# Altium PCB WizBoard.PcbDoc
Units mm, origin at the board's own origin, x right, y up, seen from the top; angles counter-clockwise.
Board outline 23.62 x 43.18 mm, 4 copper layers (Top Layer, GND, 3V3, Bottom Layer), stack 0.603 mm thick; 31 components, 48 nets, 165 pads, 62 vias.
Unrouted connection lines stored in the file: 6.
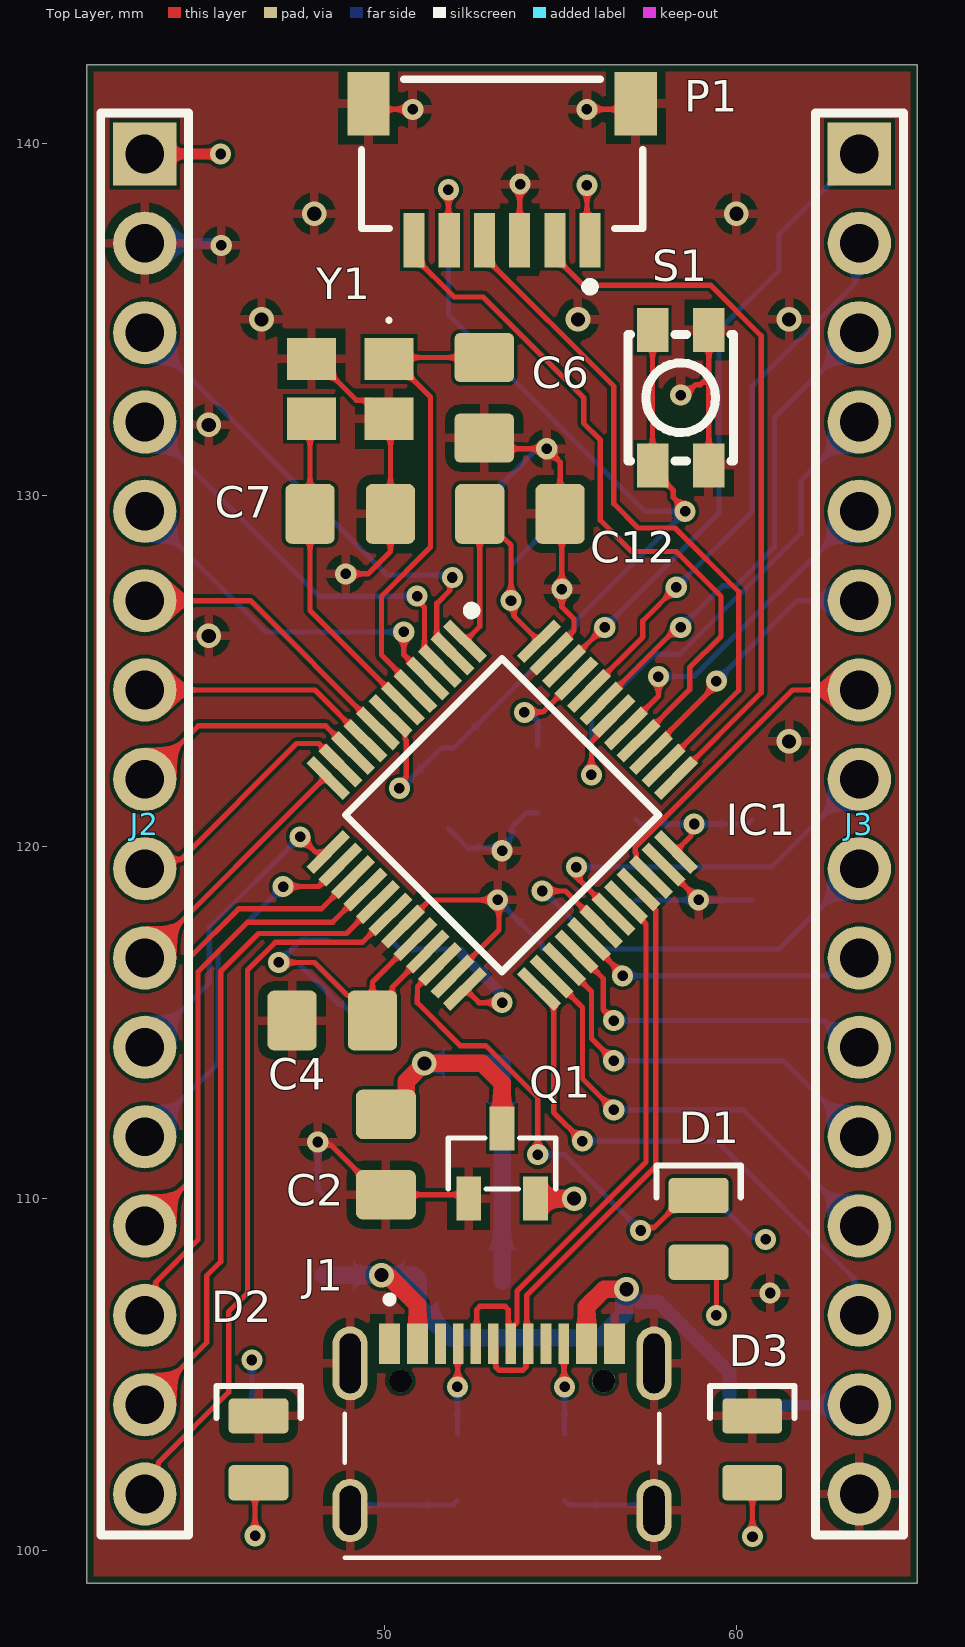
[diagram p0: Top Layer view]
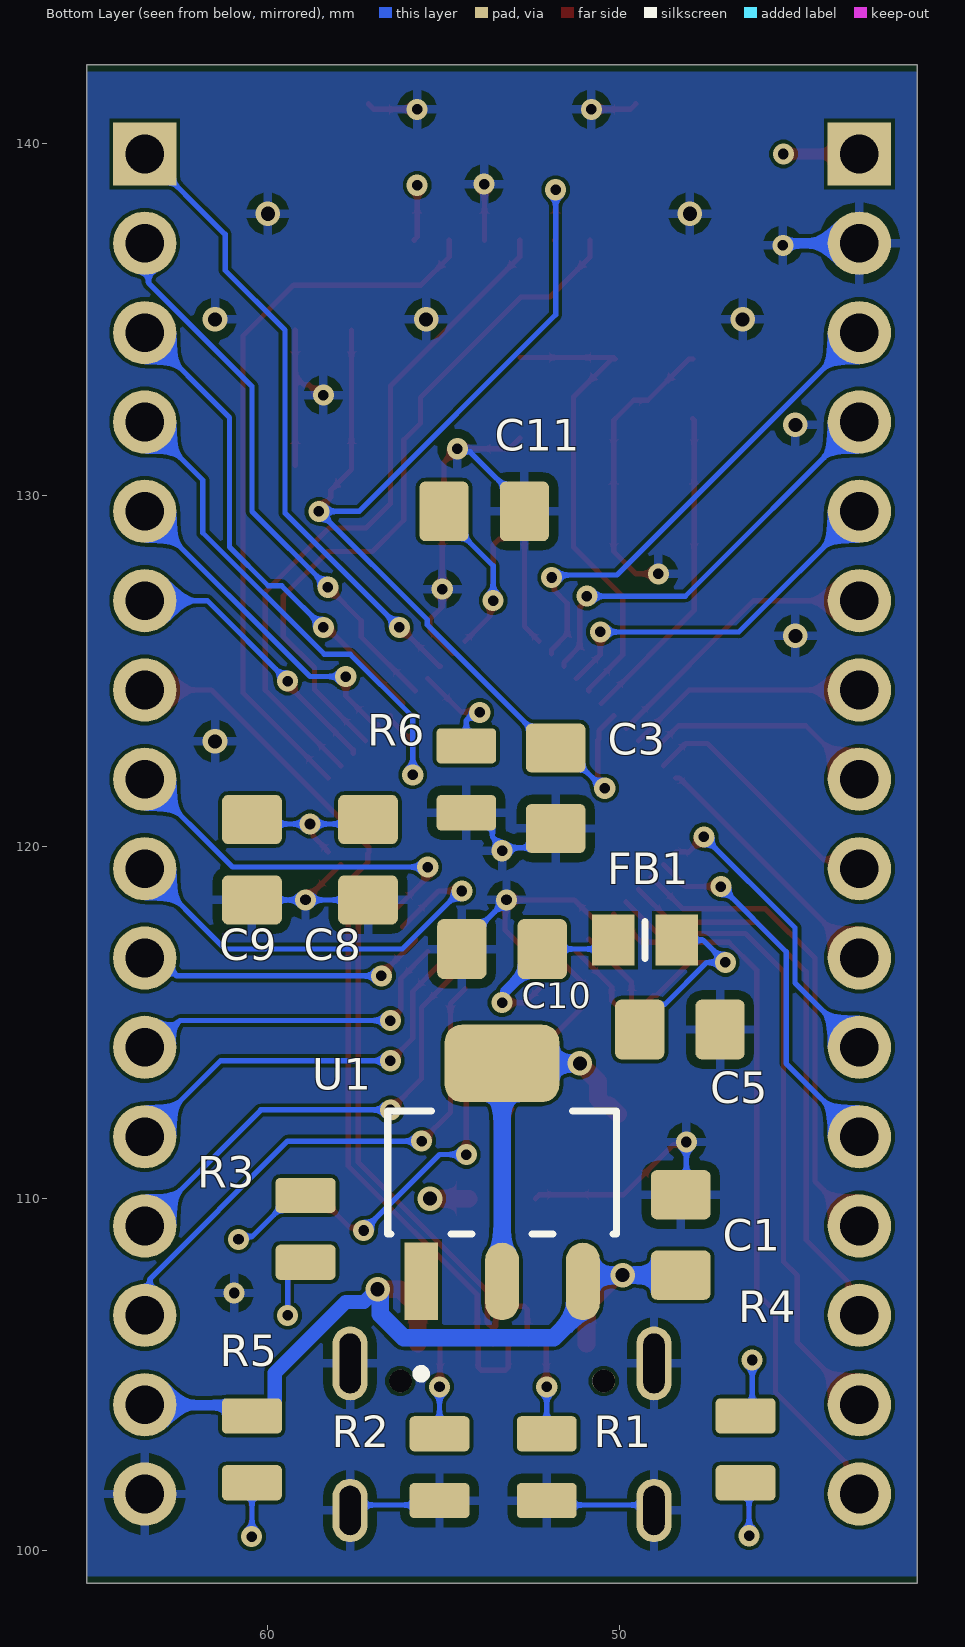
[diagram p1: Bottom Layer view, seen from below]
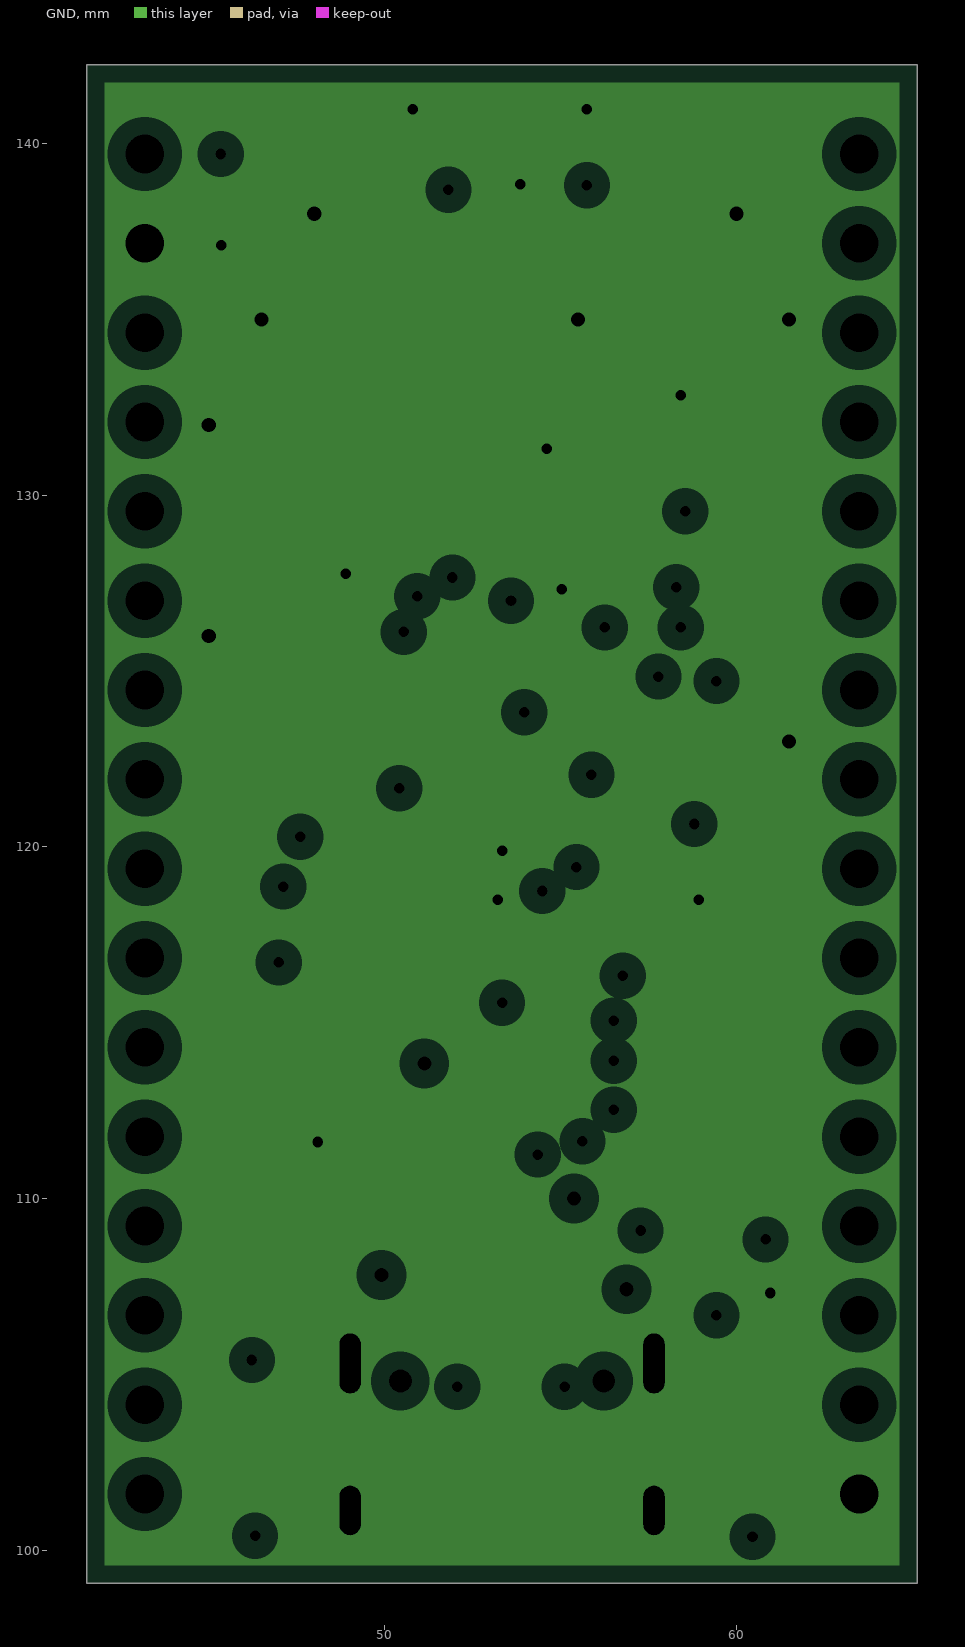
[diagram p2: GND, clearances drawn from the general rule]
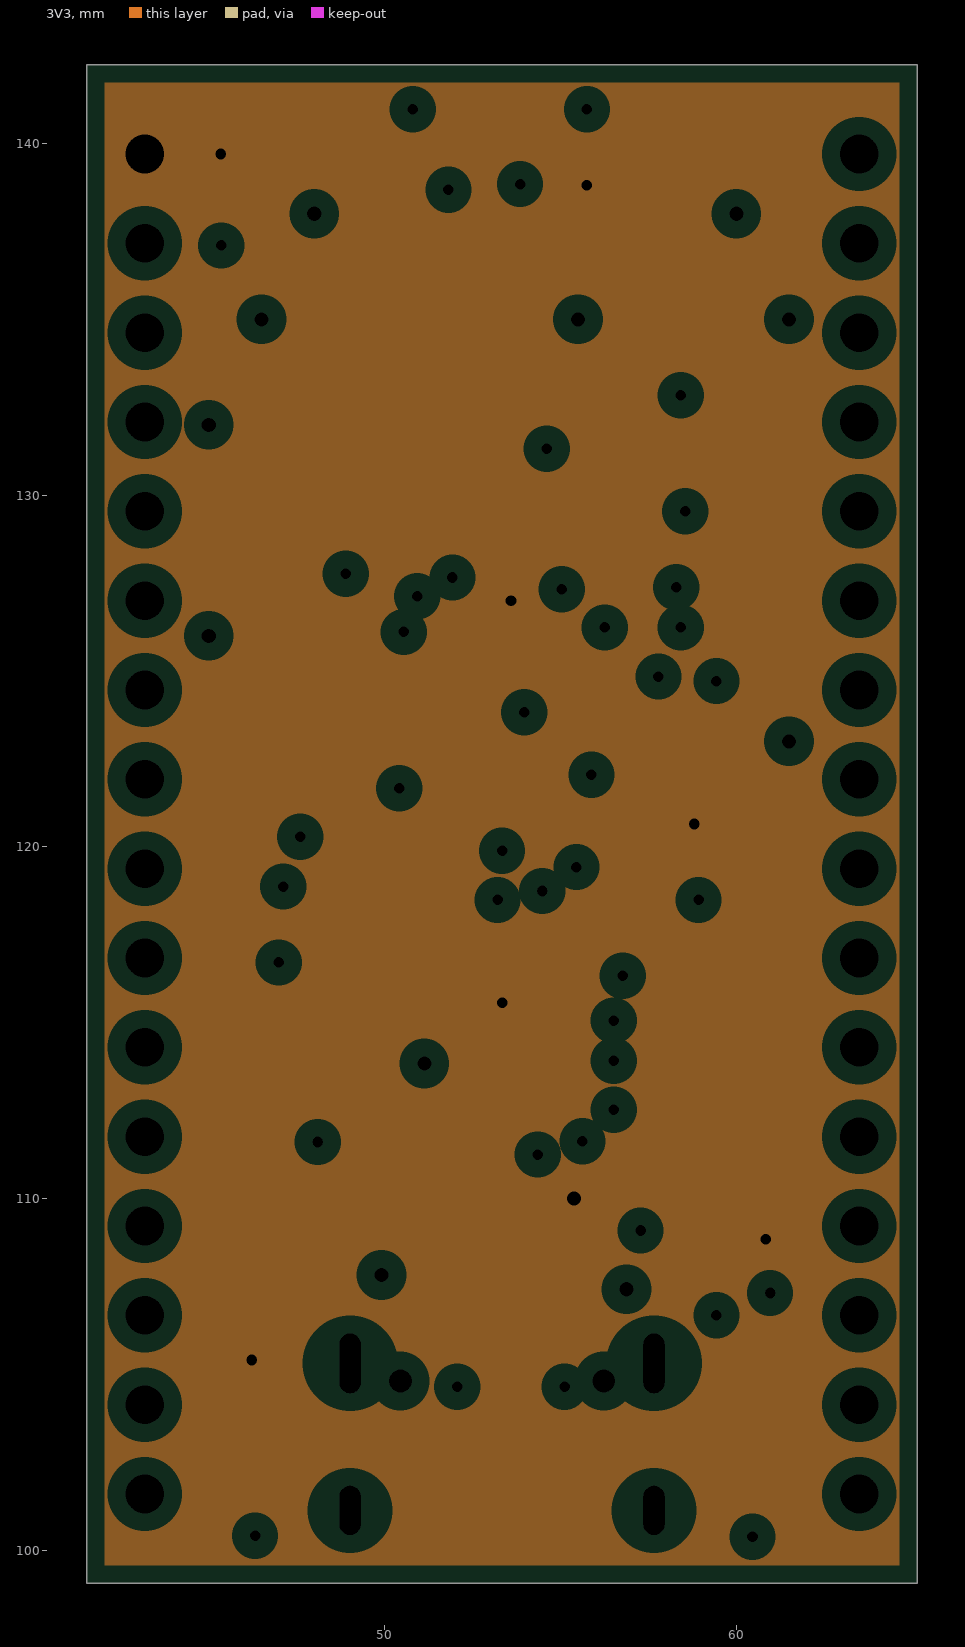
[diagram p3: 3V3, clearances drawn from the general rule]
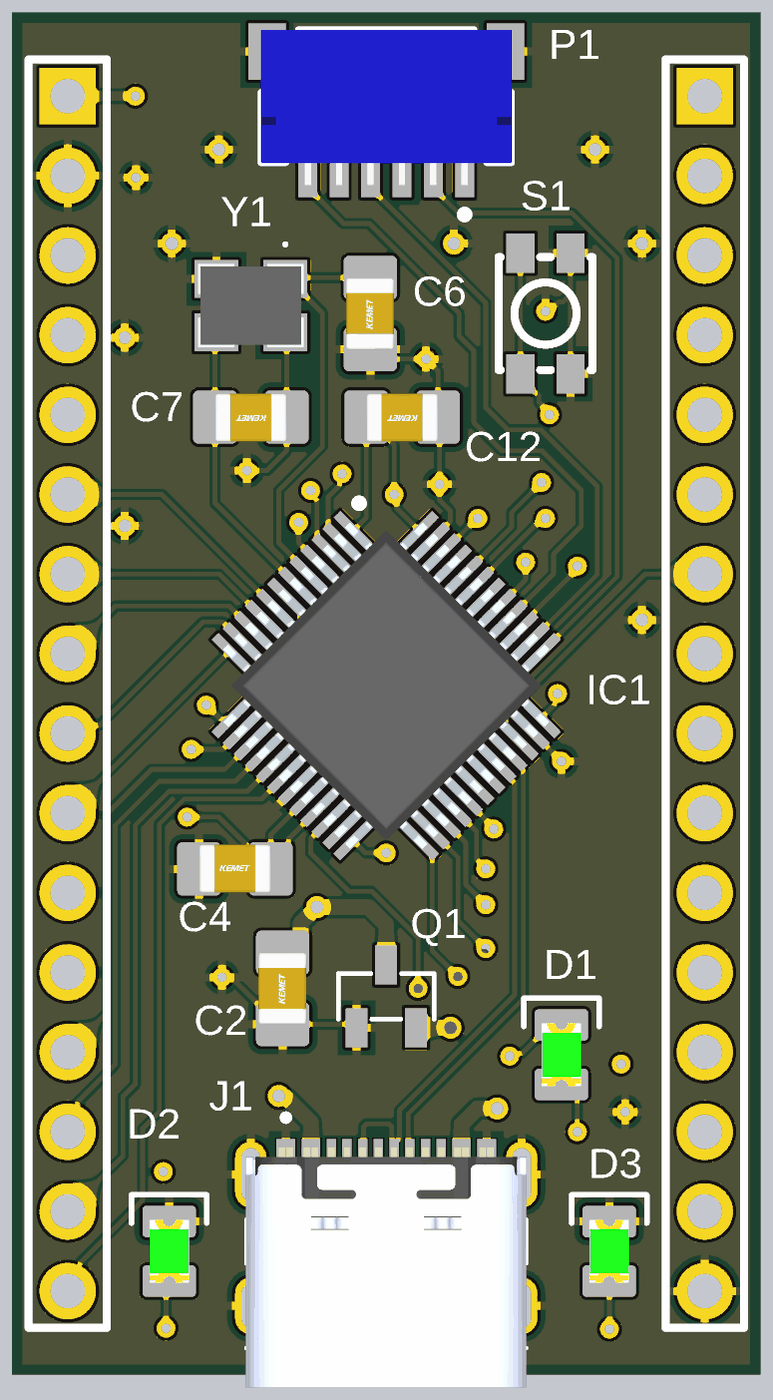
[diagram p4: 3D render of the assembled board from above, using the file's embedded part models]
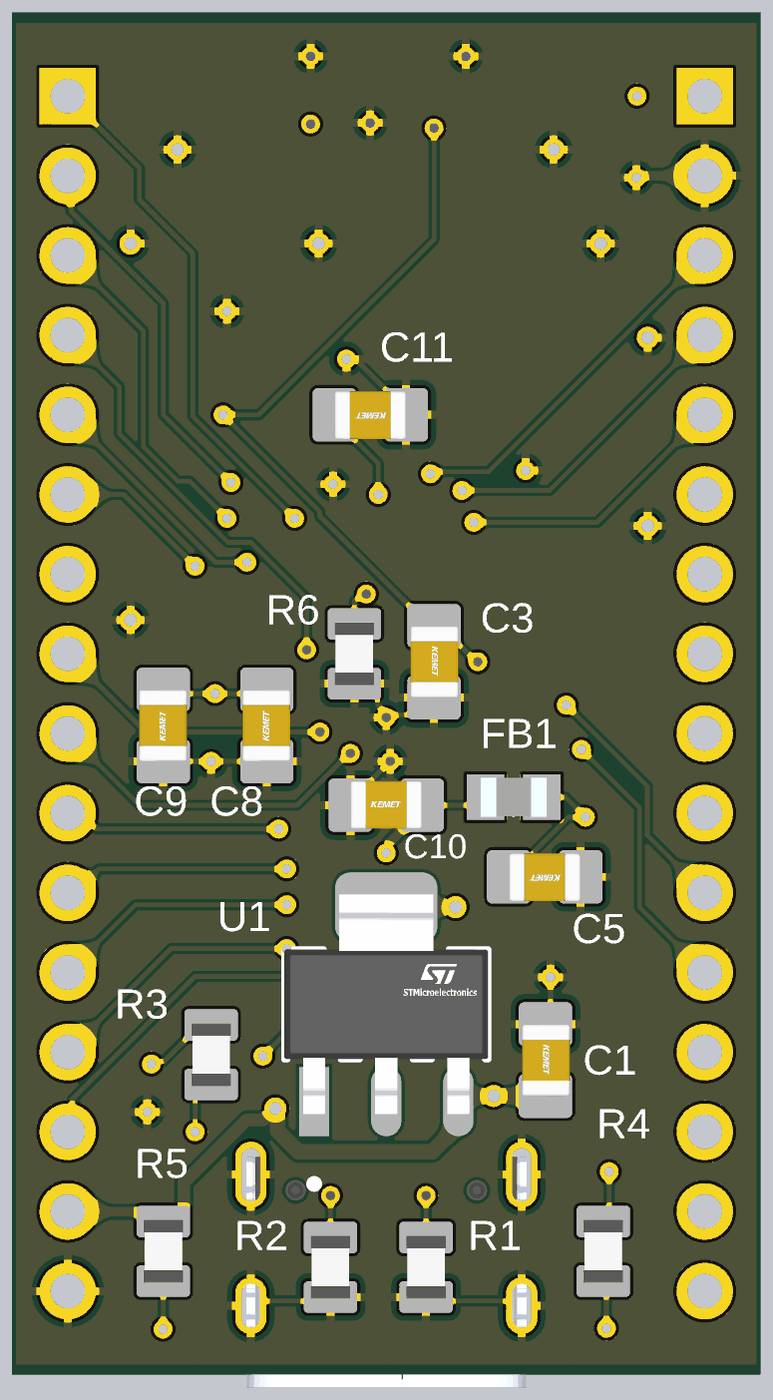
[diagram p5: 3D render of the assembled board from below, using the file's embedded part models]

## Layer stack, top to bottom
Top Solder: solder mask 0.0102, Solder Resist, Dk 3.5
Top Layer: signal copper 0.0356
Dielectric 2: prepreg 0.0711, PP-006, Dk 4.1
GND: plane copper 0.035, net GND
Dielectric 1: dielectric 0.32, FR-4, Dk 4.8
3V3: plane copper 0.035, net 3V3
Dielectric 3: prepreg 0.0711, PP-006, Dk 4.1
Bottom Layer: signal copper 0.0356
Bottom Solder: solder mask 0.0102, Solder Resist, Dk 3.5

## Board outline
41.529,99.06 41.529,142.24 65.151,142.24 65.151,99.06

## Design rules (kind name [scope] priority, off if disabled: settings)
BoardOutlineClearance [All] p1: gap=0.2 ignorepadtopadclearanceinfootprint=FALSE
Clearance [All] p1: gap=0.1 ignorepadtopadclearanceinfootprint=TRUE
Clearance Clearance_Layer [OnLayer('GND') Or OnLayer('5V')] p2: gap=0.2 ignorepadtopadclearanceinfootprint=TRUE
DiffPairsRouting [All] p1: maxlimit=0.152 minlimit=0.127 mostfreqgap=0.152 toplayer_minwidth=0.152 toplayer_maxwidth=0.178 toplayer_prefwidth=0.152 bottomlayer_minwidth=0.152 bottomlayer_maxwidth=0.178 bottomlayer_prefwidth=0.152 maxuncoupledlength=12.7
HoleSize [All] p1: absolutevalues=TRUE maxlimit=6.3 minlimit=0.15 maxpercent=80.000 minpercent=20.000
HoleToHoleClearance PAD-HoleToHoleClearance [IsPad] p1: gap=0.45 allowstackedmicrovias=FALSE
HoleToHoleClearance Via-HoleToHoleClearance [IsVia] p2: gap=0.2 allowstackedmicrovias=FALSE
MinimumAnnularRing [All] p1: minimumring=0.1
MinimumAnnularRing VIA-MinimumAnnularRing [IsVia] p2: minimumring=0.1
MinimumAnnularRing PAD-MinimumAnnularRing [IsPad] p3: minimumring=0.2
MinimumSolderMaskSliver [All] p1: minsoldermaskwidth=0.1
PlaneClearance [All] p1: clearance=0.508
PlaneConnect [All] p1: planeconnectstyle=Relief reliefexpansion=0.508 reliefentries=4 reliefconductorwidth=0.254 reliefairgap=0.254
PolygonConnect [All] p1: connectstyle=Relief reliefconductorwidth=0.254 reliefentries=4 polygonreliefangle="90 Angle" airgapwidth=0.254
RoutingVias [All] p1: holewidth=0.3 width=0.6 viastyle="Through Hole" minholewidth=0.2 minwidth=0.3 maxholewidth=6.3 maxwidth=6.5
SilkToSilkClearance [All] p1: silktosilkclearance=0.15
SolderMaskExpansion [All] p1: expansion=0.102 istentingtop=FALSE
SupplyNets "Schematic Supply Nets_4" [InNet('3V3')] p1: voltage=0.000
SupplyNets "Schematic Supply Nets_3" [InNet('3V3A')] p2: voltage=0.000
SupplyNets "Schematic Supply Nets_2" [InNet('LDO_OUT')] p3: voltage=0.000
SupplyNets "Schematic Supply Nets_1" [InNet('5V')] p4: voltage=0.000
SupplyNets "Schematic Supply Nets" [InNet('GND')] p5: voltage=0.000
Width [All] p1: maxlimit=10 minlimit=0.1 preferedwidth=0.15 toplayer_maxwidth=10 minimp=50.000000 maximp=50.000000 favimp=50.000000
23 further rules are at their usual default settings.

## Components (designator, comment, footprint, x,y, rotation, side; value= is the part's Value field where it differs from the comment)
C1 "1u" CAP_0805 48.26,108.966 r270 bottom locked
C2 "4.7u" CAP_0805 50.038,111.252 r90 top locked
C3 "100n" CAP_0805 51.816,121.666 r270 bottom locked
C4 "100n" CAP_0805 48.514,115.062 r0 top locked
C5 "1u" CAP_0805 48.284,114.808 r0 bottom locked
C6 "22p" CAP_0805 52.832,132.769 r90 top locked
C7 "22p" CAP_0805 49.022,129.467 r180 top locked
C8 "1u" CAP_0805 57.15,119.634 r90 bottom locked
C9 "100n" CAP_0805 60.452,119.634 r90 bottom locked
C10 "100n" CAP_0805 53.34,117.094 r180 bottom locked
C11 "100n" CAP_0805 53.848,129.54 r0 bottom locked
C12 "100n" CAP_0805 53.848,129.467 r180 top locked
D1 "GREEN" LED_0805_RED 58.928,109.138 r270 top locked
D2 "GREEN" LED_0805_RED 46.416,102.87 r270 top locked
D3 "GREEN" LED_0805_RED 60.452,102.87 r270 top locked
FB1 "GZ2012D601TF" BEADC2112X105N 49.276,117.348 r0 bottom locked
IC1 "STM32G474CBT6" QFP50P900X900X160-48N 53.34,120.904 r315 top locked
J1 "TYPE-C_16PIN_2MD_(073)" SHOUHAN_TYPE-C_16PIN_2MD_(073) 53.34,103.505 r0 top locked
J2 "ZX-PZ2.54-1-16PZZ" "16p Pin Header" 43.18,120.65 r270 top locked
J3 "ZX-PZ2.54-1-16PZZ" "16p Pin Header" 63.5,120.65 r270 top locked
P1 "6 Pin JST-SH" JST-SM06B-SRSS-TB_V 53.34,139.7 r180 top locked
Q1 "PJM10H01PSA" SOT-23 53.34,110.998 r270 top locked
R1 "5k1" RES_0805 52.07,102.362 r270 bottom locked
R2 "5k1" RES_0805 55.118,102.362 r270 bottom locked
R3 "470" RES_0805 58.928,109.138 r270 bottom locked
R4 "470" RES_0805 46.416,102.87 r270 bottom locked
R5 "470" RES_0805 60.452,102.87 r270 bottom locked
R6 "10k" RES_0805 54.356,121.92 r270 bottom locked
S1 "C4B1802110" SW-SMD_4P-L3.5-W3.0-P1.50-LS4.7 58.42,132.769 r90 top locked
U1 "LDL1117S33R" SOT-223 53.34,110.744 r90 bottom locked
Y1 "X32258MOB4SI" X32258MOB4SI 49.022,133.023 r180 top locked

## Footprints (in the part's own frame and the unit in brackets; to place one, negate y for a bottom-side part, rotate by r counter-clockwise, add the part's x,y. Pads: shape width x height; smd on the part's side, far side on the other; paste and mask are expansions set on the pad)
"16p Pin Header" [mm] "16p 2.54mm Pitch, 1 row, Mmale pin header"
  rect 1.8x1.8 hole 1.1: 1(-19.05,0)
  round 1.8 hole 1.1: 2(-16.51,0) 3(-13.97,0) 4(-11.43,0) 5(-8.89,0) 6(-6.35,0) 7(-3.81,0) 8(-1.27,0) 9(1.27,0) 10(3.81,0) 11(6.35,0) 12(8.89,0) 13(11.43,0) 14(13.97,0) 15(16.51,0) 16(19.05,0)
  silkscreen extent -20.22,-1.25 20.22,1.25
BEADC2112X105N [mm]
  rect 1.2x1.45 smd: 1(-0.9,0) 2(0.9,0)
  silkscreen extent 0,-0.53 0,0.53, body extent -1.05,-0.63 1.05,0.63, height 1.05
CAP_0805 [mm]
  rrect25% 1.4x1.7 smd: 1(-1.143,0) 2(1.143,0)
  body extent -1.15,-0.76 1.15,0.79, height 1.01
JST-SM06B-SRSS-TB_V [mm] "SMD, 6-Leads, Body 8x4.25mm, Pitch 1mm"
  rect 0.6x1.55 smd: 1(-2.5,2.45) 2(-1.5,2.45) 3(-0.5,2.45) 4(0.5,2.45) 5(1.5,2.45) 6(2.5,2.45)
  rect 1.2x1.8 smd: MP1(-3.8,-1.425) MP2(3.8,-1.425)
  silkscreen extent -4,-2.12 4,3.9, body extent -4,-2.12 4,2.83, height 2.96
LED_0805_RED [mm]
  rrect25% 1x1.7 smd: A(0.95,0) K(-0.95,0)
  silkscreen extent -1.8,-1.2 -0.9,1.2, body extent -1,-0.63 1,0.63, height 1.12
QFP50P900X900X160-48N [mm]
  rect 1.475x0.3 smd: 1(-4.238,2.75) 2(-4.238,2.25) 3(-4.238,1.75) 4(-4.238,1.25) 5(-4.238,0.75) 6(-4.238,0.25) 7(-4.238,-0.25) 8(-4.238,-0.75) 9(-4.238,-1.25) 10(-4.238,-1.75) 11(-4.238,-2.25) 12(-4.238,-2.75) 25(4.238,-2.75) 26(4.238,-2.25) 27(4.238,-1.75) 28(4.238,-1.25) 29(4.238,-0.75) 30(4.238,-0.25) 31(4.238,0.25) 32(4.238,0.75) 33(4.238,1.25) 34(4.238,1.75) 35(4.238,2.25) 36(4.238,2.75)
  rect 0.3x1.475 smd: 13(-2.75,-4.238) 14(-2.25,-4.238) 15(-1.75,-4.238) 16(-1.25,-4.238) 17(-0.75,-4.238) 18(-0.25,-4.238) 19(0.25,-4.238) 20(0.75,-4.238) 21(1.25,-4.238) 22(1.75,-4.238) 23(2.25,-4.238) 24(2.75,-4.238) 37(2.75,4.238) 38(2.25,4.238) 39(1.75,4.238) 40(1.25,4.238) 41(0.75,4.238) 42(0.25,4.238) 43(-0.25,4.238) 44(-0.75,4.238) 45(-1.25,4.238) 46(-1.75,4.238) 47(-2.25,4.238) 48(-2.75,4.238)
  silkscreen extent -4.85,-3.15 3.15,3.62, body extent -4.5,-4.5 4.5,4.5, height 1.6
RES_0805 [mm]
  rrect25% 1x1.7 smd: 1(-0.95,0) 2(0.95,0)
  body extent -1,-0.63 1,0.63, height 0.47
SHOUHAN_TYPE-C_16PIN_2MD_(073) [mm]
  rect 0.6x1.15 smd paste+0 mask+0: A1_B12(-3.2,2.372) A4_B9(-2.4,2.372) B1_A12(3.2,2.372) B4_A9(2.4,2.372)
  rect 0.3x1.15 smd paste+0 mask+0: A5(-1.25,2.372) A6(-0.25,2.372) A7(0.25,2.372) A8(1.25,2.372) B5(1.75,2.372) B6(0.75,2.372) B7(-0.75,2.372) B8(-1.75,2.372)
  oval 1x1.8 hole 0.6 slot 1.4 at 90 deg mask+0.102: SH1(-4.32,-2.372) SH2(4.32,-2.372)
  oval 1x2.1 hole 0.6 slot 1.7 at 90 deg mask+0.102: SH3(-4.32,1.807) SH4(4.32,1.807)
  round 0.65 hole 0.65 unplated mask+0: ""(-2.89,1.308) ""(2.89,1.308)
  silkscreen extent -4.47,-3.72 4.47,3.73, body extent -4.47,-4.97 4.47,2.68, height 3.26
SOT-23 [mm] "SOT-23-3_L2.9-W1.3-P0.95-LS2.4-BR"
  rect 1.25x0.7 smd: 1(1,-0.95) 2(1,0.95) 3(-1,0)
  silkscreen extent -0.73,-1.53 0.73,1.53
SOT-223 [mm]
  rect 2.204x0.96 smd paste+0 mask+0: 1(-3.1,2.3)
  rrect100% 2.204x0.96 smd paste+0 mask+0: 2(-3.1,0) 3(-3.1,-2.3)
  rrect44% 2.204x3.26 smd paste+0 mask+0: 4(3.1,0)
  silkscreen extent -5.85,-3.25 1.75,3.25, body extent -3.5,-3.25 3.5,3.25, height 1.9
SW-SMD_4P-L3.5-W3.0-P1.50-LS4.7 [mm]
  rect 1.25x0.9 smd: 1(-1.925,0.8) 2(1.925,0.8) 3(1.925,-0.8) 4(-1.925,-0.8)
  silkscreen extent -1.8,-1.5 1.8,1.5, body extent -2.22,-1.37 2.21,1.38, height 2.05
X32258MOB4SI [mm]
  rect 1.4x1.2 smd: 1(-1.1,-0.85) 2(1.1,-0.85) 3(1.1,0.85) 4(-1.1,0.85)
  silkscreen extent -1.15,-2 -1.05,-1.9, body extent -1.68,-1.33 1.68,1.33, height 0.9

## Part data
C1 C5 C8: library part CAP_0805, "Capacitor SMD 0805", LCSC=C116352, Manufacturer="Samsung Electro-Mechanics", Manufacturer Part Number=CL21B105KAFNNNE, Rating=25V, Distributor Link=https://www.lcsc.com/product-detail/C116352.html?spm=wm.fly.bg.0.xh___wm.fly.tp.4.ml&lcsc_vid=RgJaBFdeQAVXBFNWRFFdUVZXR1lbUVIAQgJYXwBWRlExVlNRQFhXX1FUQFNYUzsOAxUeFF5JWBYZEEoKFBINSQcJGk4eFQsCAgIaSgADAwAHC0slRVheUFZQTk8GEwkK
C2: library part CAP_0805, "Capacitor SMD 0805", LCSC=C98192, Manufacturer="Samsung Electro-Mechanics", Manufacturer Part Number=CL21A475KBQNNNE, Rating=50V, Distributor Link=https://www.lcsc.com/product-detail/C98192.html?spm=wm.fly.bg.0.xh___wm.fly.tp.4.ml&lcsc_vid=RgJaBFdeQAVXBFNWRFFdUVZXR1lbUVIAQgJYXwBWRlExVlNRQFhXX1FUQFNYUzsOAxUeFF5JWBYZEEoKFBINSQcJGk4eFQsCAgIaSgADAwAHC0slRVheUFZQTk8GEwkK
C3 C4 C9 C10 C11 C12: library part CAP_0805, "Capacitor SMD 0805", LCSC=C1711, Manufacturer="Samsung Electro-Mechanics", Manufacturer Part Number=CL21B104KBCNNNC, Rating=50V, Distributor Link=https://www.lcsc.com/product-detail/C1711.html?spm=wm.fly.bg.2.xh___wm.fly.tp.4.ml&lcsc_vid=RgJaBFdeQAVXBFNWRFFdUVZXR1lbUVIAQgJYXwBWRlExVlNRQFhXX1FUQFNYUzsOAxUeFF5JWBYZEEoKFBINSQcJGk4eFQsCAgIaSgADAwAHC0slRVheUFZQTk8GEwkK
C6 C7: library part CAP_0805, "Capacitor SMD 0805", LCSC=C1804, Manufacturer="Samsung Electro-Mechanics", Manufacturer Part Number=CL21C220JBANNNC, Rating=50V, Distributor Link=https://www.lcsc.com/product-detail/C1804.html?spm=wm.fly.bg.0.xh___wm.fly.tp.4.ml&lcsc_vid=RgJaBFdeQAVXBFNWRFFdUVZXR1lbUVIAQgJYXwBWRlExVlNRQFhXX1FUQFNYUzsOAxUeFF5JWBYZEEoKFBINSQcJGk4eFQsCAgIaSgADAwAHC0slRVheUFZQTk8GEwkK
D1 D2 D3: library part LED_0805_RED, "LED 0805 RED SMD"
FB1: "Ferrite Beads 600 @ 100MHz 500mA 0805 RoHS", Manufacturer_Name=SUNLORD, Datasheet Link=https://datasheet.lcsc.com/szlcsc/Sunlord-GZ2012D601TF_C1017.pdf, Height=1.05mm, Manufacturer_Part_Number=GZ2012D601TF
IC1: "Integrated Circuit", Arrow Part Number=STM32G474CBT6TR, LCSC=C730123, Manufacturer Name=STMicroelectronics, Mouser Part Number=511-STM32G474CBT6TR, Arrow Price/Stock=https://www.arrow.com/en/products/stm32g474cbt6tr/stmicroelectronics.html?utm_currency=USD&region=nac, Datasheet Link=https://www.st.com/resource/en/datasheet/stm32g474cb.pdf, Height=1.6mm, Manufacturer Part Number=STM32G474CBT6TR, Mouser Price/Stock=https://www.mouser.co.uk/ProductDetail/STMicroelectronics/STM32G474CBT6TR?qs=sPbYRqrBIVmx65Oml6enIQ%3D%3D
J1: "DC-5V 5A Type C USB"
J2 J3: "Pin Header 1 2.5mm 6mm -40℃~+105℃ 3mm 16P 2.54mm 3A 1x16P Through Hole,P=2.54mm Headers, Male Pins RoHS", Manufacturer=Megastar, Manufacturer Part Number=ZX-PZ2.54-1-16PZZ, Parameter 2=C7501270
P1: library part CMP-2000-07080-1, "Male Header, Pitch 1 mm, 1 x 6 Position, Height 2.95 mm, -25 to 85 degC, RoHS, Tape and Reel", Manufacturer=JST, Package Description="Male Header, Pitch 1 mm, 1 X 6 Position, Height 2.9 mm", Package Reference=SM06B-SRSS-TB, Datasheet URL=https://datasheet.ciiva.com/26894/getdatasheetpartid-708885-26894671.pdf, Datasheet Version=11/2010, Manufacturer URL=http://www.jst.com/home2.html, Mounting Technology=SurfaceMount, No of Positions=6, Pitch=1mm, Style/Orientation=RightAngleHeader/Plug, Termination=Solder, Type=ShroudedHeader
Q1: "P-Channel 100V 1A 0.5W Surface Mount SOT-23", LCSC=C2838029, Manufacturer=PJSEMI, Manufacturer Part Number=PJM10H01PSA
R1 R2: library part RES_0805, "Resistor SMD 0805", LCSC=C2907269, Manufacturer=FOJAN, Manufacturer Part Number=FRC0805F5101TS, Distributor Link=https://www.lcsc.com/product-detail/C2907269.html?spm=wm.fly.bg.2.xh___wm.mly.mlk.28-0-0.ml&lcsc_vid=RgJaBFdeQAVXBFNWRFFdUVZXR1lbUVIAQgJYXwBWRlExVlNRQFhXX1ZXT1RaUzsOAxUeFF5JWBYZEEoKFBINSQcJGk4dAgUUFAk%3D
R3 R4 R5: library part RES_0805, "Resistor SMD 0805", LCSC=C2907267, Manufacturer=FOJAN, Manufacturer Part Number=FRC0805F4700TS, Distributor Link=https://www.lcsc.com/product-detail/C2907267.html?spm=wm.fly.bg.1.stp___wm.mly.mlk.28-0-0.ml&lcsc_vid=RgJaBFdeQAVXBFNWRFFdUVZXR1lbUVIAQgJYXwBWRlExVlNRQFhXX1ZXT1RaUzsOAxUeFF5JWBYZEEoKFBINSQcJGk4dAgUUFAk%3D
R6: library part RES_0805, "Resistor SMD 0805", LCSC=C2907219, Manufacturer=FOJAN, Manufacturer Part Number=FRC0805F1002TS, Distributor Link=https://www.lcsc.com/product-detail/C2907219.html?spm=wm.fly.bg.1.xh___wm.mly.mlk.28-0-0.ml&lcsc_vid=RgJaBFdeQAVXBFNWRFFdUVZXR1lbUVIAQgJYXwBWRlExVlNRQFhXX1ZXT1RaUzsOAxUeFF5JWBYZEEoKFBINSQcJGk4dAgUUFAk%3D
S1: "SMD NO Push Button Switch"
U1: "IC REG LINEAR 3.3V 1.2A SOT223"
Y1: "Crystal or Oscillator", Manufacturer_Name=YXC, Datasheet Link=https://item.szlcsc.com/datasheet/X32258MOB4SI/2777872.html, Height=0.8mm, Manufacturer_Part_Number=X32258MOB4SI

## Via types
v1: diameter 0.6, hole 0.3, Top Layer to Bottom Layer, 50 vias
v2: diameter 0.7, hole 0.4, Top Layer to Bottom Layer, 12 vias

## Nets (pads, with @x,y where several pads share a name; then routed paths per layer and width w, separated by ;. In a path a pad name is that pad's centre, name@x,y a point inside that pad or via, vN(x,y) a via of type N, cw(c..) or ccw(c..) an arc to the next point about the centre after c; other vN are vias at no path point)
3V3: C8.2 C9.2 C10.2 C11.2 C12.2 FB1.2 IC1.1 IC1.24 IC1.36 IC1.48 J2.1 P1.1 Q1.2 R3.1 R4.1 | length 30
  Top Layer w0.15: IC1.24 52.681,115.57 v1(53.34,115.57) ; IC1.1 52.705,126.262 C12.2 52.705,129.371 53.322,128.754 53.418,128.754 53.594,128.578 v1(53.594,127) 53.68,126.914 53.68,126.557 IC1.48 ; v1(55.753,138.811) 55.753,137.337 P1.1 ; IC1.36 58.322,119.893 58.322,119.917 58.715,120.31 58.715,120.564 v1(58.801,120.65)
  Top Layer w0.3: J2.1 v1(45.339,139.7)
  Top Layer w0.5: Q1.2 v2(55.388,109.998)
  Bottom Layer w0.15: v1(46.228,105.41) 46.228,104.008 R4.1 ; FB1.2 50.43,117.094 C10.2 C10.2@52.197,116.944 ; 53.254,115.887 53.254,115.656 v1(53.34,115.57) ; v1(53.594,127) 53.594,127.993 54.991,129.39 C11.2 ; C8.2 57.277,120.65 60.325,120.65 C9.2 ; R3.1 59.278,110.088 60.441,108.925 60.747,108.925 v1(60.833,108.839)
  Bottom Layer w0.3: C10.2@52.197,116.944 53.254,115.887
3V3A: C4.2 C5.2 FB1.1 IC1.20 IC1.21 | length 13.7
  Top Layer w0.15: v1(46.99,116.713) 48.006,116.713 48.944,115.775 49.04,115.775 C4.2@49.657,115.158 ; IC1.20 49.657,116.16 C4.2@49.657,115.158 ; IC1.21 50.22,116.017 50.22,115.625 C4.2 C4.2@49.657,115.158
  Bottom Layer w0.15: FB1.1 47.625,117.348 v1(46.99,116.713) 47.522,116.713 48.714,115.521 48.81,115.521 49.427,114.904 C5.2
5V: C1.2 J1.A4_B9 J1.B4_A9 J3.15 R5.1 U1.3 | length 24.3
  Top Layer w0.5: v2(49.911,107.823) 49.949,107.785 50.126,107.785 50.94,106.971 J1.A4_B9 ; J1.B4_A9 55.74,106.921 56.242,107.423 v2(56.877,107.423)
  Bottom Layer w0.15: C1.2 C1.2@48.262,107.825 ; v2@56.806,107.352 v2(56.877,107.423) ; R5.1@59.802,104.241 60.223,103.82 R5.1 R5.1@60.762,104.13 ; J3.15@63.49,104.13 J3.15
  Bottom Layer w0.3: R5.1@60.762,104.13 J3.15@63.49,104.13
  Bottom Layer w0.4: v2(56.877,107.423) 56.899,107.423 57.261,107.061 57.785,107.061 59.802,105.044 R5.1@59.802,104.241
  Bottom Layer w0.5: C1.2@48.262,107.825 48.265,107.823 v2(49.911,107.823) 49.917,107.817 50.828,107.817 50.954,107.69 50.954,106.957 51.866,106.045 56.134,106.045 56.806,106.717 v2@56.806,107.352
BOOT: IC1.45 R6.1 | length 3.1
  Top Layer w0.15: v1(53.975,123.825) 53.982,123.832 54.5,123.832 IC1.45
  Bottom Layer w0.15: v1(53.975,123.825) 54.061,123.739 54.212,123.739 54.356,123.595 R6.1
CC1: J1.A5 R1.1 | length 2.6
  Top Layer w0.15: v1(52.07,104.648) 52.08,104.658 52.08,105.867 J1.A5
  Bottom Layer w0.15: R1.1 v1(52.07,104.648)
CC2: J1.B5 R2.1 | length 2.6
  Top Layer w0.15: J1.B5 55.104,105.864 55.104,104.662 v1(55.118,104.648)
  Bottom Layer w0.15: R2.1 v1(55.118,104.648)
GND: C1.1 C2.1 C3.2 C4.1 C5.1 C6.1 C7.1 C8.1 C9.1 C10.1 C11.1 C12.1 D2.K D3.K IC1.19 IC1.23 IC1.35 IC1.47 J1.A1_B12 J1.B1_A12 J1.SH1 J1.SH2 J1.SH3 J1.SH4 J2.2 J3.16 P1.3 P1.MP1 P1.MP2 Q1.1 R1.2 R2.2 R6.2 S1.3 S1.4 Y1.2 Y1.4 | length 59.9
  Top Layer w0.15: Y1.2 48.022,133.873 49.197,132.698 49.597,132.698 Y1.4 50.165,132.13 50.165,128.397 49.53,127.762 v1(48.895,127.762) ; v1(48.1,111.608) 48.186,111.522 48.475,111.522 49.888,110.109 C2.1 52.279,110.109 Q1.1 ; J1.SH3@49.02,104.763 J1.SH3 ; P1.MP2 49.695,140.97 v1(50.8,140.97) ; IC1.19 51.281,118.491 v1(53.213,118.491) 53.254,118.45 53.254,117.636 IC1.23 ; C6.1 53.14,131.318 v1(54.61,131.318) 54.991,130.937 C12.1 55.039,129.419 v1(55.039,127.327) 55.039,126.825 55.388,126.476 55.388,126.151 IC1.47@54.737,125.5 ; P1.3 53.84,138.832 v1(53.852,138.845) ; v1(55.753,140.97) 56.985,140.97 P1.MP1 ; IC1.35 57.928,119.495 58.928,118.494 v1(58.928,118.491) ; v1(58.42,132.842) 58.542,132.842 58.839,133.139 58.971,133.139 59.22,133.388 ; S1.4 59.22,133.388 ; S1.3 59.22,133.388 ; D3.K D3.K@60.752,103.52
  Bottom Layer w0.15: v1@45.294,137.16 v1(45.355,137.099) ; v1(48.1,111.608) 48.1,110.269 C1.1 ; J1.SH1 49.172,101.285 51.943,101.285 R1.2 ; C3.2 52.365,119.974 53.254,119.974 v1(53.34,119.888) 53.34,120.01 53.612,120.282 53.612,120.549 54.033,120.97 R6.2 ; C11.1 52.705,129.69 54.247,131.232 54.524,131.232 v1(54.61,131.318) ; v1(53.213,118.491) 54.483,117.221 C10.1 ; R2.2 55.245,101.285 57.508,101.285 J1.SH2 ; C8.1 C9.1
  Bottom Layer w0.3: J2.2 v1@45.294,137.16
  other v1: 60.96,107.315
  other v2: 61.5,123 45,126 45,132 46.5,135 55.5,135 61.5,135 48,138 60,138
HSE_IN: C6.2 IC1.5 Y1.1 | length 13.6
  Top Layer w0.15: Y1.1 50.222,133.873 51.308,132.787 51.308,128.524 49.911,127.127 49.911,125.452 50.874,124.49 IC1.5 ; Y1.1@50.161,133.912 C6.2
HSE_OUT: C7.2 IC1.6 Y1.3 | length 9.2
  Top Layer w0.15: Y1.3 47.879,132.13 C7.2 47.879,126.719 IC1.6
L1: IC1.2 J2.3 | length 14.2
  Top Layer w0.15: v1(51.929,127.659) 51.854,127.583 51.854,127.292 51.485,126.923 51.485,126.047 51.934,125.598 IC1.2
  Bottom Layer w0.15: J2.3 50.071,127.729 51.859,127.729 v1(51.929,127.659)
L2: IC1.3 J2.4 | length 12.1
  Top Layer w0.15: v1(50.927,127.127) 50.927,127.019 51.132,126.814 51.132,125.693 51.581,125.244 IC1.3
  Bottom Layer w0.15: J2.4 48.133,127.127 v1(50.927,127.127)
L3: IC1.4 J2.5 | length 10.4
  Top Layer w0.15: v1(50.546,126.111) 50.546,125.466 IC1.4
  Bottom Layer w0.15: J2.5 46.609,126.111 v1(50.546,126.111)
L4: IC1.8 J2.6 | length 8.1
  Top Layer w0.15: J2.6 46.183,127 IC1.8
L5: IC1.9 J2.7 | length 6.9
  Top Layer w0.15: J2.7 48.016,124.46 IC1.9
L6: IC1.10 J2.8 | length 6.9
  Top Layer w0.15: J2.8 44.704,123.444 48.325,123.444 IC1.10
L7: IC1.11 J2.9 | length 7.3
  Top Layer w0.15: J2.9 43.444,119.644 44.206,119.644 47.498,122.936 48.126,122.936 IC1.11
L8: IC1.12 J2.10 | length 7.3
  Top Layer w0.15: J2.10 48.296,121.956 IC1.12
L9: IC1.13 J2.11 | length 8.8
  Top Layer w0.15: v1(47.6,120.286) 48.033,119.852 IC1.13
  Bottom Layer w0.15: J2.11 45.013,116.133 45.013,117.699 v1(47.6,120.286)
L10: IC1.14 J2.12 | length 10.6
  Top Layer w0.15: v1(47.117,118.872) 48.126,118.872 IC1.14
  Bottom Layer w0.15: J2.12 45.263,113.843 45.263,117.018 v1(47.117,118.872)
L11: IC1.15 J2.13 | length 13.8
  Top Layer w0.15: J2.13 44.445,110.485 44.445,116.835 45.847,118.237 48.198,118.237 IC1.15
L12: IC1.16 J2.14 | length 16.1
  Top Layer w0.15: J2.14 43.496,106.996 43.496,107.631 44.695,108.83 44.695,116.45 46.101,117.856 48.524,117.856 IC1.16
L13: IC1.17 J2.15 | length 18.5
  Top Layer w0.15: J2.15 44.945,105.905 44.945,107.81 45.339,108.204 45.339,116.459 46.419,117.539 48.915,117.539 IC1.17
L14: IC1.18 J2.16 | length 20.8
  Top Layer w0.15: J2.16 43.18,102.046 43.571,102.438 43.571,102.5 45.567,104.495 45.567,106.781 46.101,107.315 46.101,116.496 46.894,117.289 49.372,117.289 IC1.18
LDO_OUT: C2.2 Q1.3 U1.2 U1.4 | length 15.1
  Top Layer w0.15: C2.2@50.328,112.613 C2.2@50.727,113.012 ; Q1.3@53.065,112.548 Q1.3@53.34,112.273
  Top Layer w0.5: C2.2 50.292,112.649 50.417,112.649 50.613,112.845 50.613,113.328 v2(51.129,113.844) 52.78,113.844 53.34,113.284 53.34,112.273 Q1.3
  Bottom Layer w0.5: v2(51.129,113.844) U1.4 U1.2
LED_INBUILT: D1.K IC1.22 | length 13.4
  Top Layer w0.15: IC1.22 50.937,116.026 50.937,115.778 50.927,115.769 50.927,115.57 52.148,114.349 52.876,114.349 54.356,112.869 v1(54.356,111.252) ; v1(57.277,109.093) 57.363,109.179 57.669,109.179 58.578,110.088 D1.K
  Bottom Layer w0.15: v1(54.356,111.252) 55.118,111.252 v1(57.277,109.093)
NRST: C3.1 IC1.7 P1.5 S1.1 S1.2 | length 33.4
  Top Layer w0.15: IC1.7 50.582,123.309 50.582,123.061 50.616,123.027 50.616,121.984 50.419,121.788 v1(50.419,121.666) ; v1(51.816,138.684) 51.816,137.274 P1.5 ; S1.2 57.62,130.728 58.207,130.141 58.207,129.942 58.547,129.602 v1(58.547,129.54)
  Bottom Layer w0.15: v1(50.419,121.666) 50.471,121.666 51.614,122.809 C3.1 51.966,122.809 55.465,126.308 55.465,126.458 v1(58.547,129.54) 57.404,129.54 51.816,135.128 v1(51.816,138.684)
R1: IC1.46 J3.1 | length 18.1
  Top Layer w0.15: IC1.46 55.13,125.138 56.23,126.238 v1(56.261,126.238)
  Bottom Layer w0.15: v1(56.261,126.238) 59.511,129.488 59.511,134.691 61.214,136.394 61.214,137.414 J3.1
R2: IC1.44 J3.2 | length 15.9
  Top Layer w0.15: IC1.44 57.342,125.967 57.342,126.43 v1(58.293,127.381)
  Bottom Layer w0.15: v1(58.293,127.381) 60.452,129.54 60.452,133.092 63.395,136.035 63.395,137.055 J3.2
R3: IC1.43 J3.3 | length 13.9
  Top Layer w0.15: IC1.43 58.32,126.238 v1(58.42,126.238)
  Bottom Layer w0.15: v1(58.42,126.238) 59.606,127.424 59.987,127.424 61.087,128.524 61.087,132.207 J3.3
R4: IC1.42 J3.4 | length 15.6
  Top Layer w0.15: v1(55.88,122.047) 55.88,122.984 56.513,123.618 IC1.42
  Bottom Layer w0.15: v1(55.88,122.047) 55.88,123.698 57.658,125.476 58.393,125.476 61.849,128.932 61.849,130.429 J3.4
R5: IC1.41 J3.5 | length 9.6
  Top Layer w0.15: IC1.41 56.867,123.476 56.973,123.476 57.785,124.288 v1(57.785,124.841)
  Bottom Layer w0.15: v1(57.785,124.841) 58.801,124.841 J3.5
R6: IC1.39 J3.6 | length 7.8
  Top Layer w0.15: IC1.39 57.574,122.758 59.436,124.62 v1(59.436,124.714)
  Bottom Layer w0.15: v1(59.436,124.714) 61.722,127 J3.6
R7: IC1.34 J3.7 | length 9.3
  Top Layer w0.15: IC1.34 57.159,119.56 57.159,119.808 57.125,119.841 57.125,119.986 61.599,124.46 J3.7
R8: IC1.31 J3.8 | length 10.9
  Top Layer w0.15: v1(55.454,119.426) 55.454,119.144 IC1.31
  Bottom Layer w0.15: v1(55.454,119.426) 61.006,119.426 J3.8
R9: IC1.30 J3.9 | length 12.7
  Top Layer w0.15: v1(54.483,118.745) 55.145,118.745 IC1.30
  Bottom Layer w0.15: v1(54.483,118.745) 54.527,118.745 56.178,117.094 61.214,117.094 J3.9
R10: IC1.29 J3.10 | length 8.4
  Top Layer w0.15: IC1.29 55.806,117.336 56.769,116.373 v1(56.769,116.332)
  Bottom Layer w0.15: v1(56.769,116.332) 62.587,116.332 63.095,116.84 J3.10
R11: IC1.28 J3.11 | length 9.7
  Top Layer w0.15: IC1.28 56.218,116.258 56.218,115.375 56.515,115.078 v1(56.515,115.062)
  Bottom Layer w0.15: v1(56.515,115.062) 62.499,115.062 63.261,114.3 J3.11
R12: IC1.27 J3.12 | length 11.2
  Top Layer w0.15: IC1.27 55.88,115.889 55.88,114.554 v1(56.515,113.919)
  Bottom Layer w0.15: v1(56.515,113.919) 61.341,113.919 J3.12
R13: IC1.26 J3.13 | length 12.9
  Top Layer w0.15: IC1.26 55.63,115.432 55.63,113.407 v1(56.515,112.522)
  Bottom Layer w0.15: v1(56.515,112.522) 60.198,112.522 J3.13
R14: IC1.25 J3.14 | length 15.3
  Top Layer w0.15: IC1.25 54.808,115.547 54.808,112.451 v1(55.626,111.633)
  Bottom Layer w0.15: v1(55.626,111.633) 59.436,111.633 63.352,107.717 63.352,106.828 J3.14
RL_3: D2.A R4.2 | length 3.1
  Top Layer w0.15: v1(46.317,100.414) 46.317,101.821 D2.A
  Bottom Layer w0.15: v1(46.317,100.414) 46.317,101.821 R4.2
RL_5: D3.A R5.2 | length 3.1
  Top Layer w0.15: D3.A 60.461,101.911 v1(60.461,100.388)
  Bottom Layer w0.15: R5.2 60.452,100.397 v1(60.461,100.388)
RL_IN: D1.A R3.2 | length 3.5
  Top Layer w0.15: D1.A 59.015,108.188 59.436,107.767 v1(59.436,106.68)
  Bottom Layer w0.15: R3.2 59.015,108.188 59.436,107.767 v1(59.436,106.68)
SDWIO: IC1.37 P1.2 | length 20.8
  Top Layer w0.15: P1.2 54.84,136.775 55.644,135.971 59.266,135.971 60.706,134.531 60.706,124.381 IC1.37
SWCLK: IC1.38 P1.4 | length 19.4
  Top Layer w0.15: P1.4 52.84,136.775 56.515,133.1 56.515,129.757 57.207,129.065 58.26,129.065 60.071,127.254 60.071,124.453 IC1.38
SWO: IC1.40 P1.6 | length 20
  Top Layer w0.15: P1.6 50.84,136.775 51.979,135.636 52.803,135.636 55.661,132.778 55.661,132.045 56.134,131.572 56.134,129.286 57.023,128.397 58.293,128.397 59.563,127.127 59.563,125.984 58.674,125.095 58.674,124.47 IC1.40
USB_N: IC1.32 J1.A7 J1.B7 | length 17
  Top Layer w0.152: J1.B7 52.62,105.908 52.62,106.845 52.71,106.934 53.427,106.934 53.516,106.845 53.516,106.376 53.565,106.327 53.59,106.327 J1.A7 ; J1.A7@53.59,106.303 53.764,106.476 53.764,107.372 57.433,111.041 57.433,117.797 56.971,118.259 56.971,118.438 IC1.32
USB_P: IC1.33 J1.A6 J1.B6 | length 17
  Top Layer w0.152: J1.A6 53.164,105.804 53.164,105.206 53.253,105.116 53.929,105.116 54.018,105.206 54.018,105.806 J1.B6 ; J1.B6@54.043,105.877 54.043,107.256 57.713,110.926 57.713,118.195 57.221,118.687 IC1.33
pads on no net: J1. J1.A8 J1.B8 U1.1

## Polygon pours and split planes (outlines as drawn)
GND on Bottom Layer "GND_L04_P001" (solid, remove dead copper, pour order 1): 41.529,99.06 65.151,99.06 65.151,142.24 41.529,142.24
GND on Top Layer "GND_L01_P000" (solid, remove dead copper, pour order 0): 41.529,142.24 65.151,142.24 65.151,99.06 41.529,99.06
3V3 on 3V3 (split plane): 64.641,99.57 42.039,99.57 42.039,141.73 64.641,141.73
GND on GND (split plane): 64.641,99.57 42.039,99.57 42.039,141.73 64.641,141.73

## Silkscreen, mask and mechanical layers (free items; w line width, h text height)
Board:
  the board outline again, w0.254

## Text inside footprints (layer, text, board x,y; h text height)
D1: Top Assembly "+" at 59.928,107.372 h1 r270
D2: Top Assembly "+" at 47.416,101.103 h1 r270
D3: Top Assembly "+" at 61.452,101.103 h1 r270